# Altium PCB UI.PcbDoc
Units mm, origin at the board's own origin, x right, y up, seen from the top; angles counter-clockwise.
Board outline 64.77 x 34.04 mm, 2 copper layers (Top Layer, Bottom Layer); 30 components, 34 nets, 155 pads, 12 vias.
Unrouted connection lines stored in the file: 3.
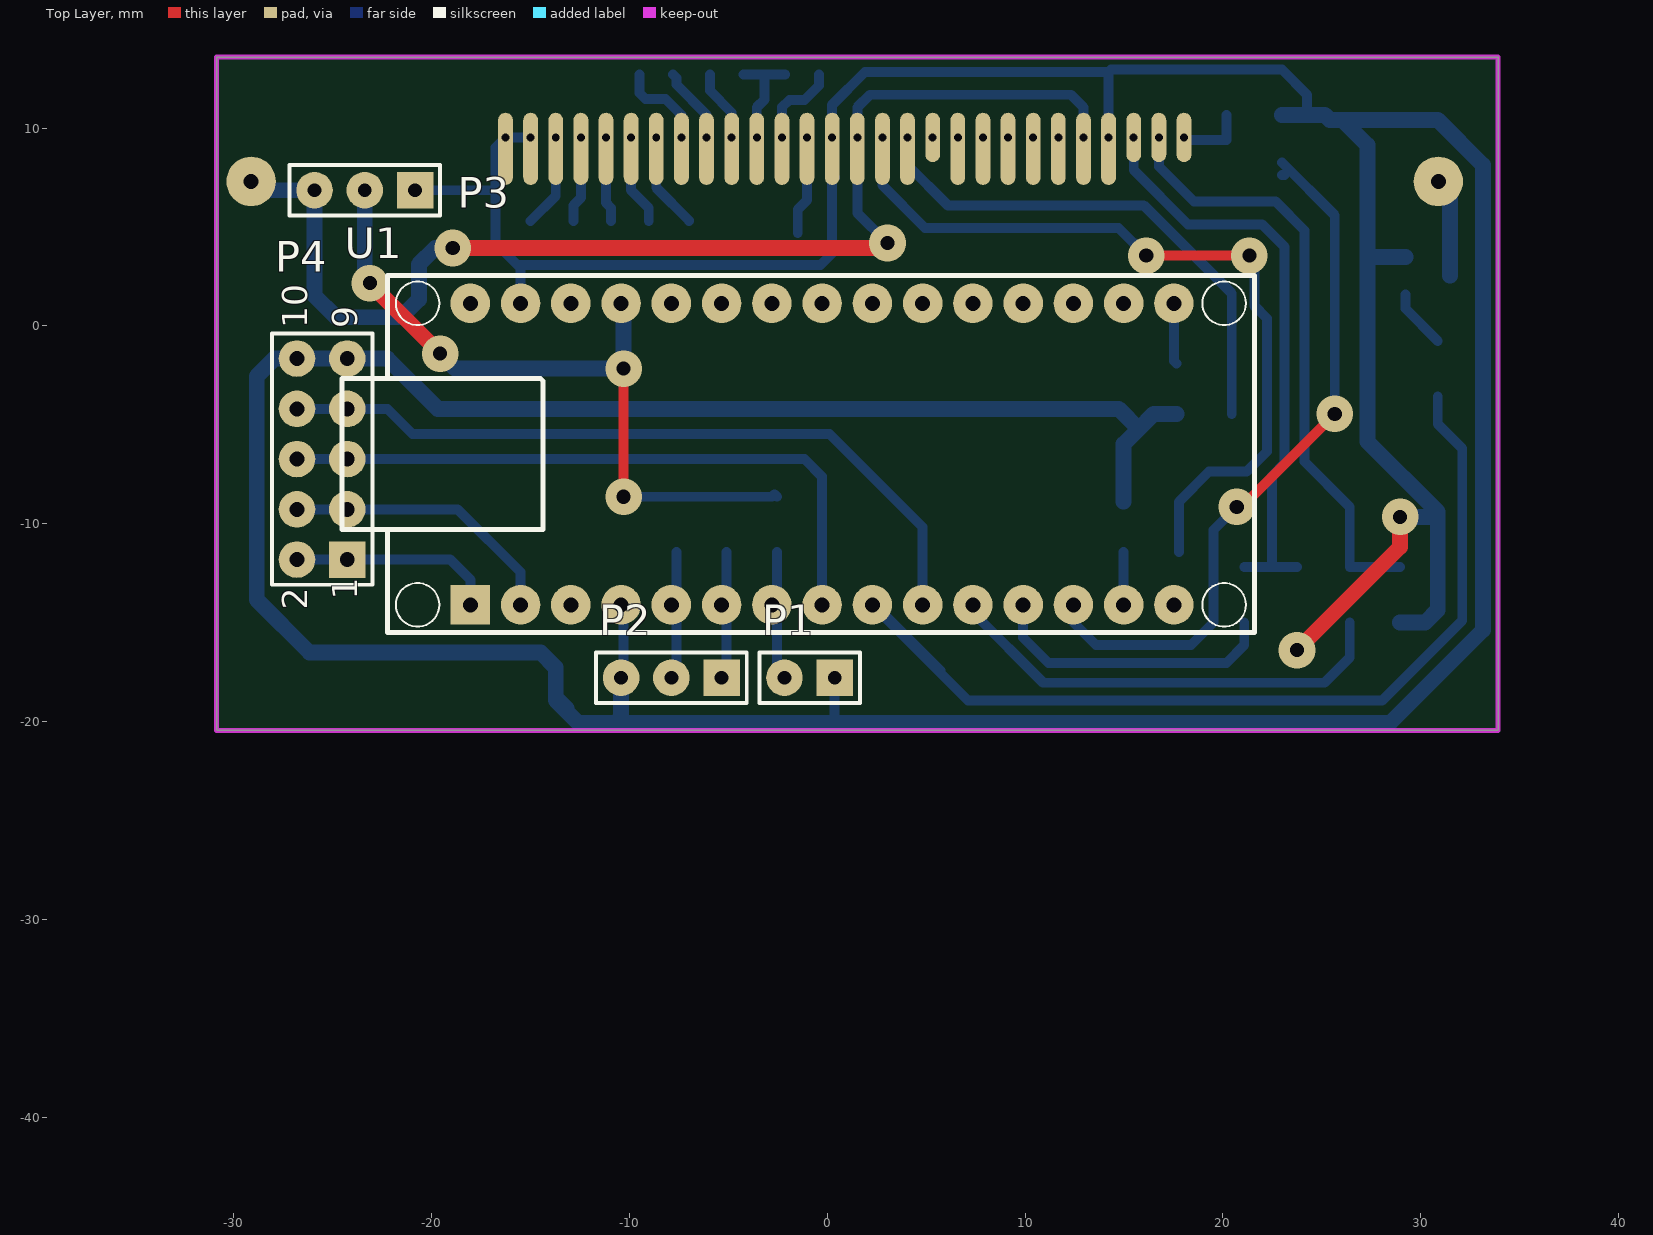
[diagram p0: Top Layer view]
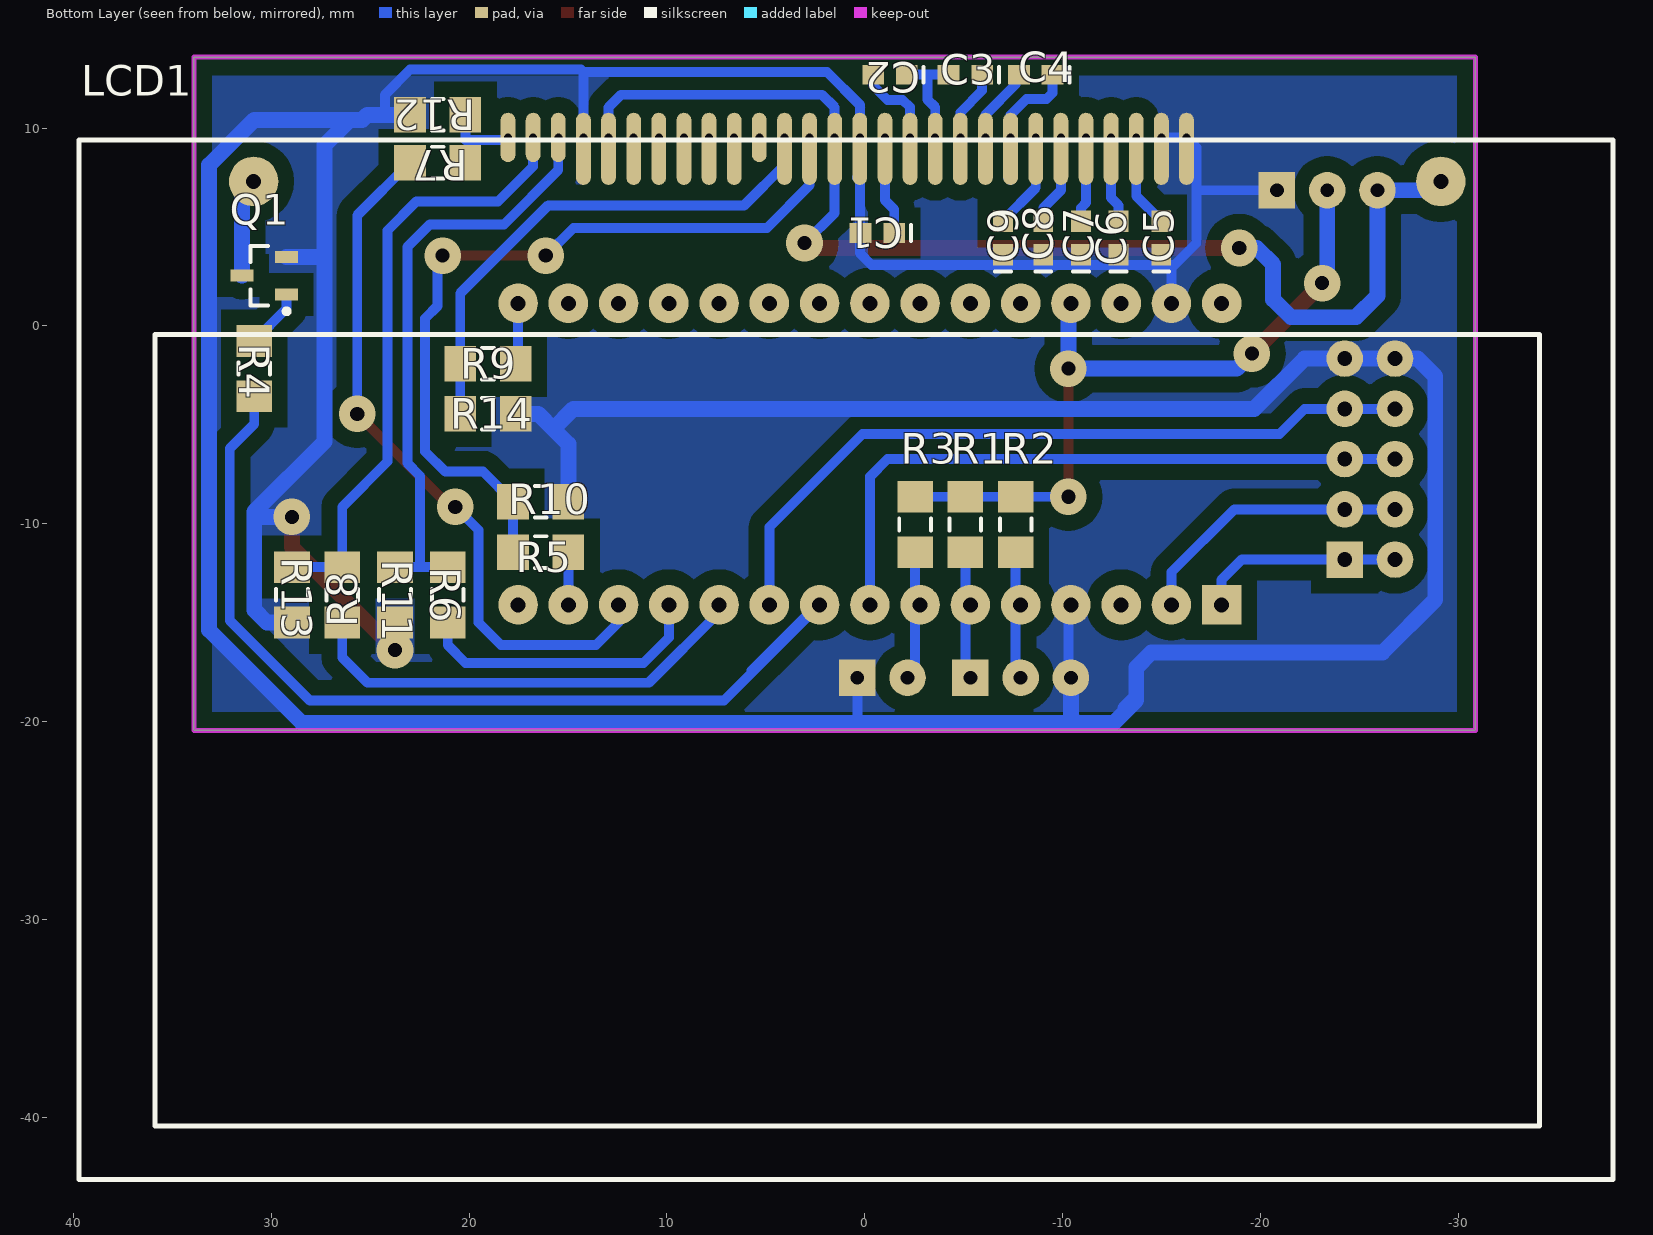
[diagram p1: Bottom Layer view, seen from below]

## Layer stack, top to bottom
Top Solder: solder mask 0.0102, Solder Resist, Dk 3.5
Top Layer: signal copper 0.0356
Dielectric 1: dielectric 0.32, FR-4, Dk 4.8
Bottom Layer: signal copper 0.0356
Bottom Solder: solder mask 0.0102, Solder Resist, Dk 3.5

## Board outline
-30.861,-20.447 -30.861,13.589 33.909,13.589 33.909,-20.447

## Design rules (kind name [scope] priority, off if disabled: settings)
Clearance "Polygon Clearance" [InPolygon] p1: gap=0.8
Clearance [All AND (Not(OnLayer('Keep-Out Layer'))) vs All AND (Not(OnLayer('Keep-Out Layer')))] p2: gap=0.4
ComponentClearance [All] p1 off: gap=0.5 collisioncheckmode=3 verticalgap=0.254 showdistances=TRUE
Height [All] p1: minheight=0 maxheight=15 prefheight=12.7
MinimumSolderMaskSliver SilkscreenOverComponentPads [All] p2: minsoldermaskwidth=0.254
PlaneConnect [All] p1: planeconnectstyle=Relief reliefexpansion=0.508 reliefentries=4 reliefconductorwidth=0.7 reliefairgap=0.6
PolygonConnect [All] p1: connectstyle=Direct reliefconductorwidth=1 reliefentries=4 polygonreliefangle="90 Angle" airgapwidth=0.254
RoutingVias [All] p1: holewidth=0.75 width=1.5 viastyle="Through Hole" minholewidth=0.75 minwidth=1.5 maxholewidth=1.25 maxwidth=3
SolderMaskExpansion [All] p1: expansion=0.102
Width [All] p1: maxlimit=8 minlimit=0.5 preferedwidth=1
27 further rules are at their usual default settings.

## Components (designator, comment, footprint, x,y, rotation, side; value= is the part's Value field where it differs from the comment)
C1 "C0603" 0603 -0.635,4.699 r0 bottom
C2 "C0603" 0603 -1.27,12.7 r0 bottom
C3 "C0603" 0603 -5.08,12.7 r0 bottom
C4 "C0603" 0603 -8.636,12.7 r0 bottom
C5 "C0603" 0603 -14.986,4.445 r90 bottom
C6 "C0603" 0603 -12.827,4.445 r90 bottom
C7 "C0603" 0603 -10.922,4.445 r90 bottom
C8 "C0603" 0603 -9.017,4.445 r90 bottom
C9 "C0603" 0603 -6.985,4.445 r90 bottom
LCD1 "NHD-C12864LZ-FSW-FBW-3V3" NHD-C12864LZ-FSW-FBW-3V3 0.889,9.398 r0 bottom
P1 "Header 2" HDR1X2 0.381,-17.78 r180 top
P2 "Header 3" HDR1X3 -5.334,-17.78 r180 top
P3 "Header 3" HDR1X3 -20.828,6.858 r180 top
P4 "Interface" HDR2X5 -24.257,-11.811 r90 top
Q1 "BC817-25" SOT-23A_N 30.353,2.54 r0 bottom
R1 "SMD" 8RB-1206 -5.08,-10.033 r90 bottom
R2 "SMD" 8RB-1206 -7.62,-10.033 r90 bottom
R3 "SMD" 8RB-1206 -2.54,-10.033 r90 bottom
R4 "SMD" 8RB-1206 30.861,-2.159 r270 bottom
R5 "SMD" 8RB-1206 16.383,-11.43 r180 bottom
R6 "SMD" 8RB-1206 21.082,-13.589 r270 bottom
R7 "SMD" 8RB-1206 21.59,8.255 r0 bottom
R8 "SMD" 8RB-1206 26.416,-13.589 r270 bottom
R9 "SMD" 8RB-1206 19.05,-1.905 r180 bottom
R10 "SMD" 8RB-1206 16.383,-8.89 r0 bottom
R11 "SMD" 8RB-1206 23.749,-13.589 r90 bottom
R12 "SMD" 8RB-1206 21.59,10.668 r180 bottom
R13 "SMD" 8RB-1206 28.956,-13.589 r90 bottom
R14 "SMD" 8RB-1206 19.05,-4.445 r0 bottom
U1 "Arduino nano" "ARDUINO NANO" 17.526,-14.097 r90 top

## Footprints (in the part's own frame and the unit in brackets; to place one, negate y for a bottom-side part, rotate by r counter-clockwise, add the part's x,y. Pads: shape width x height; smd on the part's side, far side on the other; paste and mask are expansions set on the pad)
8RB-1206 [mm] "Chip Resistor; Body 3.2 x 1.6 mm (LxW typ)"
  rect 1.6x1.8 smd: 1(-1.4,0) 2(1.4,0)
  silkscreen extent -0.3,-0.8 0.3,0.8
0603 [mm] "Chip Capacitor; Body 1.6 x 0.8 mm (LxW typ)"
  rect 1.1x1 smd: 1(-0.85,0) 2(0.85,0)
  silkscreen extent -1.7,-0.4 -1.7,0.4
"ARDUINO NANO" [mm] "ARDUINO NANO"
  rect 2x2 hole 0.762: 1(0,35.56)
  round 2 hole 0.762: 2(0,33.02) 3(0,30.48) 4(0,27.94) 5(0,25.4) 6(0,22.86) 7(0,20.32) 8(0,17.78) 9(0,15.24) 10(0,12.7) 11(0,10.16) 12(0,7.62) 13(0,5.08) 14(0,2.54) 15(0,0) 16(15.24,0) 17(15.24,2.54) 18(15.24,5.08) 19(15.24,7.62) 20(15.24,10.16) 21(15.24,12.7) 22(15.24,15.24) 23(15.24,17.78) 24(15.24,20.32) 25(15.24,22.86) 26(15.24,25.4) 27(15.24,27.94) 28(15.24,30.48) 29(15.24,33.02) 30(15.24,35.56)
  silkscreen extent -1.4,-4.06 16.64,42.04
HDR1X2 [mm] "Connector; Header; 2 Position"
  rect 1.85x1.85 hole 0.7: 1(0,0)
  round 1.85 hole 0.7: 2(2.54,0)
  silkscreen extent -1.27,-1.27 3.81,1.27
HDR1X3 [mm] "Connector; Header; 3 Position"
  rect 1.85x1.85 hole 0.7: 1(0,0)
  round 1.85 hole 0.7: 2(2.54,0) 3(5.08,0)
  silkscreen extent -1.27,-1.27 6.35,1.27
HDR2X5 [mm] "Connector; Header; 5x2 Position"
  rect 1.85x1.85 hole 0.75: 1(0,0)
  round 1.85 hole 0.75: 2(0,2.54) 3(2.54,0) 4(2.54,2.54) 5(5.08,0) 6(5.08,2.54) 7(7.62,0) 8(7.62,2.54) 9(10.16,0) 10(10.16,2.54)
  silkscreen extent -1.27,-1.27 11.43,3.81
NHD-C12864LZ-FSW-FBW-3V3 [mm] "NHD-C12864LZ-FSW-FBW-3V3"
  oval 0.75x2.5 hole 0.4: 1(17.145,-0.127) 2(15.875,-0.127) 3(14.605,-0.127) 4(13.335,-0.127) 5(12.065,-0.127) 6(10.795,-0.127) 7(9.525,-0.127) 8(8.255,-0.127) 9(6.985,-0.127) 10(5.715,-0.127) 11(4.445,-0.127) 12(3.175,-0.127) 13(1.905,-0.127) 14(0.635,-0.127) 15(-0.635,-0.127) 16(-1.905,-0.127) 17(-3.175,-0.127) 18(-4.445,-0.127) 19(-5.715,-0.127) 20(-6.985,-0.127) 21(-8.255,-0.127) 22(-9.525,-0.127) 23(-10.795,-0.127) 24(-12.065,-0.127) 25(-13.335,-0.127) 26(-14.605,-0.127) 27(-15.875,-0.127) 28(-17.145,-0.127)
  round 0 all layers, no hole: 1(17.145,1.27) 2(15.875,1.27) 3(14.605,1.27) 11(4.445,1.27)
  oval 0.75x2 all layers, no hole: 4(13.335,1.27) 5(12.065,1.27) 6(10.795,1.27) 7(9.525,1.27) 8(8.255,1.27) 9(6.985,1.27) 10(5.715,1.27) 12(3.175,1.27) 13(1.905,1.27) 14(0.635,1.27) 15(-0.635,1.27) 16(-1.905,1.27) 17(-3.175,1.27) 18(-4.445,1.27) 19(-5.715,1.27) 20(-6.985,1.27) 21(-8.255,1.27) 22(-9.525,1.27) 23(-10.795,1.27) 24(-12.065,1.27) 25(-13.335,1.27) 26(-14.605,1.27) 27(-15.875,1.27) 28(-17.145,1.27)
  round 2.5 hole 0.762: 29(-30,2.093) 30(30,2.093)
  silkscreen extent -38.7,0 38.83,52.54
SOT-23A_N [mm] "SOT23, 3-Leads, Body 2.9x1.3mm, Pitch 0.95mm, Lead Span 2.3mm, IPC Medium Density"
  rect 1.15x0.6 smd: 1(-1.125,0.95) 2(-1.125,-0.95) 3(1.125,0)
  silkscreen extent -1.25,-1.5 0.7,1.92, body extent -0.7,-1.5 0.7,1.5, height 1.09

## Part data
C1 C2 C3 C4 C5 C6 C7 C8 C9: "C1608X7R1C105K X7R"
P1: "Header, 2-Pin"
P2 P3: "Header, 3-Pin"
P4: library part "Header 5X2", "Header, 5-Pin, Dual row"
Q1: "NPN General Purpose Amplifier"
R1 R2 R3 R4 R5 R6 R7 R8 R9 R10 R11 R12 R13 R14: library part ERJ8BQ, "Low Ohmic Value Thick Film Chip Resistor, 0.22 Ohm to 9.1 Ohm Range, 1%, 2% and 5% Tolerance, 1206 Size, 0.33 W"
U1: library part "arduino nano"

## Via types
v1: diameter 1.85, hole 0.711, Top Layer to Bottom Layer, 12 vias

## Nets (pads, with @x,y where several pads share a name; then routed paths per layer and width w, separated by ;. In a path a pad name is that pad's centre, name@x,y a point inside that pad or via, vN(x,y) a via of type N, cw(c..) or ccw(c..) an arc to the next point about the centre after c; other vN are vias at no path point)
3V3: LCD1.5 LCD1.14 LCD1.29 P3.3 | length 59.4
  Top Layer w0.8: v1(-18.923,3.937) 2.794,3.937 v1(3.048,4.191)
  Bottom Layer w0.5: LCD1.14@1.524,8.128 1.524,5.715 v1(3.048,4.191) ; LCD1.14@1.524,9.525 1.524,11.049 2.159,11.684 12.319,11.684 12.954,11.049 LCD1.5@12.954,9.525
  Bottom Layer w0.8: LCD1.29 -28.664,6.858 P3.3 -25.908,1.524 -24.818,0.434 -21.537,0.434 -20.637,1.333 -20.637,3.111 v1@-19.812,3.937
5V: P3.2 R1.2 R2.2 R3.2 U1.27 | length 37
  Top Layer w0.5: v1(-10.287,-8.636) v1(-10.287,-2.159)
  Top Layer w0.8: v1(-23.114,2.159) v1(-19.558,-1.397)
  Bottom Layer w0.5: U1.27@-10.414,1.016 U1.27 ; v1(-10.287,-8.636) -2.791,-8.636 -2.664,-8.509 R3.2
  Bottom Layer w0.8: P3.2 -23.368,2.413 v1(-23.114,2.159) ; v1(-19.558,-1.397) -18.796,-2.159 v1(-10.287,-2.159) U1.27@-10.287,1.016
BACKLIGHT: R4.2 U1.9 | length 50
  Bottom Layer w0.5: U1.9 7.123,-18.934 28.056,-18.934 32.097,-14.893 32.097,-6.189 30.861,-4.953 R4.2 ; U1.9@2.413,-14.097 5.726,-17.41
DC: R6.2 U1.12 | length 14.9
  Bottom Layer w0.5: U1.12 9.906,-15.748 11.187,-17.029 20.182,-17.029 21.082,-16.129 R6.2
DC1: LCD1.3 R6.1 R11.2 | length 30
  Bottom Layer w0.5: LCD1.3@15.494,9.525 15.494,7.877 18.24,5.131 21.988,5.131 23.125,3.994 23.125,-6.937 22.479,-7.583 22.479,-12.189 ; R6.1 22.479,-12.189 ; R11.2 22.479,-12.189
ENTER: P1.2 R3.1 U1.7 | length 6
  Bottom Layer w0.5: P1.2@-2.54,-17.399 R3.1
FASEA: P2.2 R2.1 U1.5 | length 6.1
  Bottom Layer w0.5: P2.2@-7.62,-17.526 R2.1
FASEB: P2.1 R1.1 U1.6 | length 6.1
  Bottom Layer w0.5: P2.1@-5.08,-17.526 R1.1
FAULT: P4.5 P4.6 U1.8 | length 33.4
  Bottom Layer w0.5: P4.6 P4.5 -1.143,-6.731 -0.254,-7.62 U1.8
GND: C1.2 C5.1 C6.1 C7.1 C8.1 C9.1 LCD1.4 LCD1.15 LCD1.27 LCD1.28 P1.1 P2.3 P3.1 P4.9 P4.10 Q1.2 R10.1 R11.1 R12.1 R13.1 R14.1 U1.4 U1.29 | length 282.9
  Top Layer w0.8: v1(23.749,-16.383) 28.956,-11.176 v1(28.956,-9.652)
  Bottom Layer w0.5: P3.1 -16.764,6.858 ; U1.29 -15.494,2.921 ; LCD1.27@-14.986,9.525 -16.256,9.525 -16.764,9.017 -16.764,6.858 ; P2.3 -10.287,-17.653 U1.4@-10.287,-14.097 ; LCD1.15@0.254,7.874 LCD1.15@0.254,7.366 ; LCD1.15@0.254,9.525 0.254,11.176 1.905,12.827 14.224,12.827 ; P1.1 0.381,-19.939 0.508,-20.066 ; LCD1.15@0.399,7.511 LCD1.15@0.254,7.366 ; LCD1.4@14.224,9.525 14.224,12.827 ; 24.257,10.668 24.257,11.684 22.987,12.954 14.351,12.954 14.224,12.827 ; -16.764,6.858 -16.764,4.191 -15.494,2.921 ; -15.494,2.921 -15.494,3.087 -0.342,3.087 0.254,3.683 LCD1.15@0.254,7.366
  Bottom Layer w0.8: -13.182,-19.33 -13.716,-18.796 ; -10.541,-19.92 -10.414,-19.793 P2.3 ; R10.1 14.983,-5.972 15.748,-5.207 ; R14.1 16.51,-4.445 15.748,-5.207 ; R12.1 24.257,10.668 25.146,10.668 25.4,10.414 26.035,10.414 ; R13.1 30.223,-14.989 30.861,-14.351 30.861,-9.398 27.305,-5.842 27.305,3.683 ; v1(28.956,-9.652) 30.607,-9.652 ; Q1.2 27.498,3.49 27.305,3.683 ; -13.716,-18.796 -13.716,-18.923 -12.573,-20.066 0.508,-20.066 28.448,-20.066 33.147,-15.367 33.147,8.128 30.861,10.414 26.035,10.414 ; -13.716,-18.796 -13.716,-17.272 -14.478,-16.51 -26.162,-16.51 -28.829,-13.843 -28.829,-2.54 -27.94,-1.651 P4.10 P4.9 -22.225,-1.651 -19.685,-4.191 14.732,-4.191 15.748,-5.207 ; 26.035,10.414 27.305,9.144 27.305,3.683
MOSI: R5.2 U1.14 | length 2.7
  Bottom Layer w0.5: R5.2 14.986,-11.433 U1.14
MOSI1: LCD1.13 R5.1 R10.2 | length 39.3
  Top Layer w0.5: v1(16.129,3.556) v1(21.336,3.556)
  Bottom Layer w0.5: LCD1.13@2.794,8.128 2.794,7.112 4.953,4.953 14.732,4.953 v1(16.129,3.556) ; R5.1 R10.2 19.307,-7.366 21.209,-7.366 22.225,-6.35 22.225,0.381 21.59,1.016 21.59,3.302 v1(21.336,3.556)
NetC1_1: C1.1 LCD1.16 | length 3.4
  Bottom Layer w0.5: C1.1 -1.485,5.881 -1.016,6.35 LCD1.16@-1.016,7.874
NetC2_1: C2.1 C3.2 LCD1.18 | length 5.7
  Bottom Layer w0.5: C3.2 -3.175,12.7 ; LCD1.18@-3.556,9.271 -3.556,11.049 -3.175,11.43 -3.175,12.7 ; C2.1 -3.175,12.7
NetC2_2: C2.2 LCD1.17 | length 4.7
  Bottom Layer w0.5: LCD1.17@-2.286,9.271 -2.286,9.525 -2.275,9.536 -2.275,11.06 -1.91,11.425 -1.143,11.425 -0.42,12.148 C2.2
NetC3_1: C3.1 LCD1.19 | length 3.9
  Bottom Layer w0.5: C3.1 -5.93,11.899 -4.826,10.795 LCD1.19@-4.826,9.271
NetC4_1: C4.1 LCD1.21 | length 5.1
  Bottom Layer w0.5: C4.1 -9.486,11.772 -9.188,11.474 -8.172,11.474 -7.366,10.668 -7.366,9.525 LCD1.21@-7.366,9.271 ; LCD1.21@-7.366,7.366 LCD1.21@-7.228,7.504
NetC4_2: C4.2 LCD1.20 | length 4.1
  Bottom Layer w0.5: C4.2 -7.62,12.534 -7.62,12.195 -6.096,10.671 LCD1.20@-6.096,9.271
NetLCD1_30: LCD1.30 Q1.3 | length 5
  Bottom Layer w0.8: LCD1.30 31.478,6.716 Q1.3
NetQ1_1: Q1.1 R4.1 | length 3
  Bottom Layer w0.5: Q1.1 29.228,0.874 R4.1
PWR_GOOD: P4.7 P4.8 U1.10 | length 38
  Bottom Layer w0.5: P4.8 P4.7 -22.225,-4.191 -20.955,-5.461 0.127,-5.461 4.826,-10.16 U1.10
RESET: R8.2 U1.11 | length 23.2
  Bottom Layer w0.5: U1.11 7.366,-14.481 10.919,-18.034 25.146,-18.034 26.416,-16.764 R8.2
RESET1: LCD1.2 R8.1 R13.2 | length 30.7
  Bottom Layer w0.5: LCD1.2@16.764,9.525 16.764,8.063 18.542,6.285 22.671,6.285 24.13,4.826 24.13,-6.858 26.416,-9.144 R8.1 R13.2
RX: P4.3 P4.4 U1.2 | length 14.3
  Bottom Layer w0.5: P4.4 P4.3 -18.669,-9.271 -15.494,-12.446 U1.2
SCK: R9.2 U1.16 | length 3.5
  Bottom Layer w0.5: U1.16@17.526,1.524 U1.16 17.526,-1.781 R9.2
SCK1: LCD1.12 R9.1 R14.2 | length 26.3
  Bottom Layer w0.5: LCD1.12@4.064,9.271 4.064,8.128 6.096,6.096 16.002,6.096 20.45,1.648 R9.1 R14.2
SS: R7.2 U1.13 | length 36.1
  Top Layer w0.5: v1(20.701,-9.147) 20.952,-9.147 v1(25.654,-4.445)
  Bottom Layer w0.5: U1.13 12.446,-14.986 13.589,-16.129 18.389,-16.129 19.532,-14.986 19.532,-10.316 v1(20.701,-9.147) ; R7.2@22.99,7.62 R7.2@23.125,7.62 ; R7.2 25.654,5.591 v1(25.654,-4.445)
SS1: LCD1.1 R7.1 R12.2 | length 3.5
  Bottom Layer w0.5: LCD1.1@18.034,9.525 18.161,9.398 20.19,9.398 R12.2
TX: P4.1 P4.2 U1.1 | length 10.5
  Bottom Layer w0.5: P4.2 P4.1 -19.05,-11.811 -18.034,-12.827 U1.1
V0: C5.2 LCD1.26 | length 3.1
  Bottom Layer w0.5: C5.2 -13.716,6.565 LCD1.26@-13.716,7.874
V1: C6.2 LCD1.25 | length 2.7
  Bottom Layer w0.5: C6.2 -12.827,6.096 -12.446,6.477 LCD1.25@-12.446,7.874
V2: C7.2 LCD1.24 | length 2.7
  Bottom Layer w0.5: LCD1.24@-11.176,7.874 -11.176,6.223 -10.922,5.969 C7.2
V3: C8.2 LCD1.23 | length 2.9
  Bottom Layer w0.5: LCD1.23@-9.906,7.874 -9.906,6.858 -9.017,5.969 C8.2
V4: C9.2 LCD1.22 | length 3.3
  Bottom Layer w0.5: LCD1.22@-8.636,7.874 -8.636,6.985 -6.985,5.334 C9.2
pads on no net: LCD1.6 LCD1.7 LCD1.8 LCD1.9 LCD1.10 LCD1.11 U1.3 U1.15 U1.17 U1.18 U1.19 U1.20 U1.21 U1.22 U1.23 U1.24 U1.25 U1.26 U1.28 U1.30

## Polygon pours and split planes (outlines as drawn)
GND on Bottom Layer "Mechanical 1-No Net" (solid, remove dead copper, pour order 7): -30.861,-20.447 33.909,-20.447 33.909,13.589 -30.861,13.589

## Keep-outs
Keep-Out Layer:
  the board outline again, w0.254

## Text inside footprints (layer, text, board x,y; h text height)
P4: Top Overlay "2" at -26.289,-14.351 h1.27 r90; Top Overlay "1" at -23.749,-13.843 h1.27 r90; Top Overlay "9" at -23.749,-0.127 h1.27 r90; Top Overlay "10" at -26.289,-0.127 h1.27 r90